# Altium PCB 5811-LNA.PcbDoc
Units mm, origin at the board's own origin, x right, y up, seen from the top; angles counter-clockwise.
Board outline 34.67 x 14.2 mm, 4 copper layers (Top Layer, Internal Plane 1, Signal Layer 1, Bottom Layer), stack 0.925 mm thick; 51 components, 35 nets, 146 pads, 20 vias.
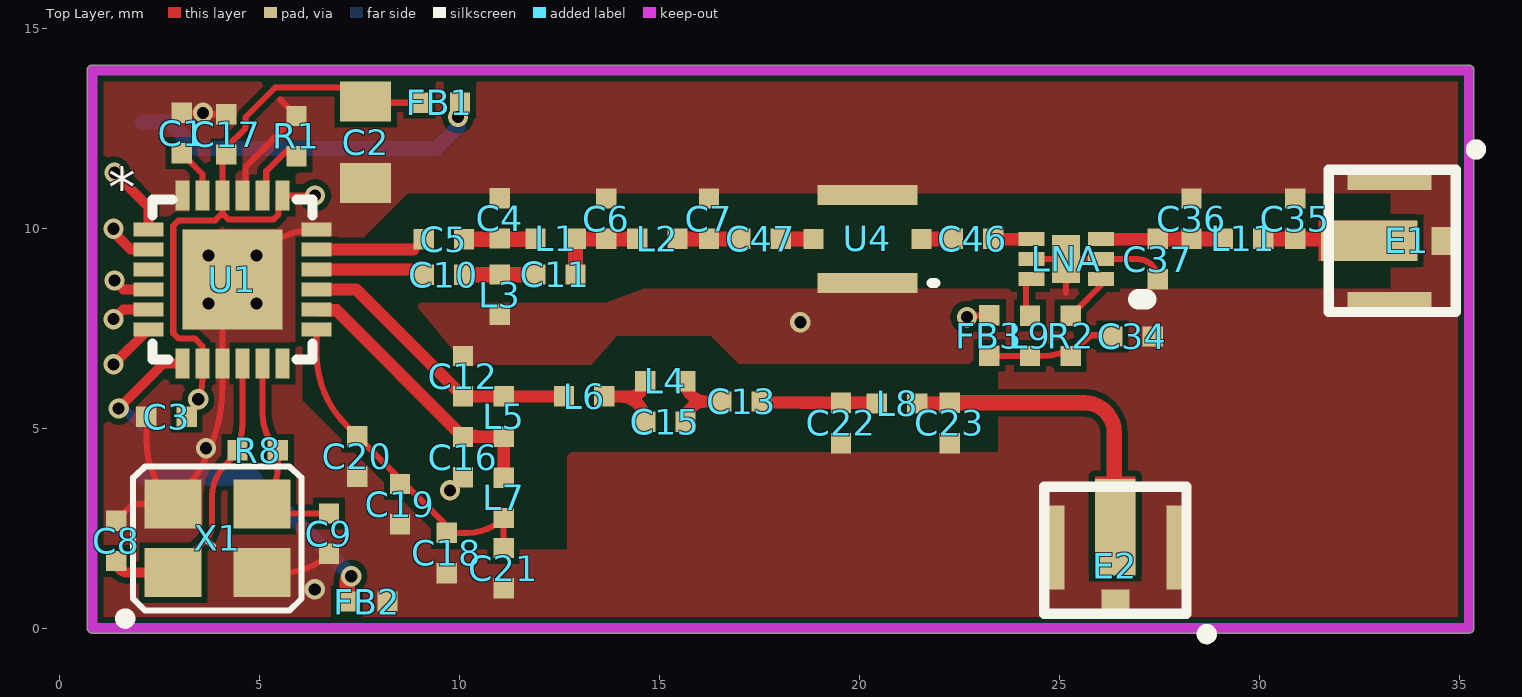
[diagram p0: Top Layer view]
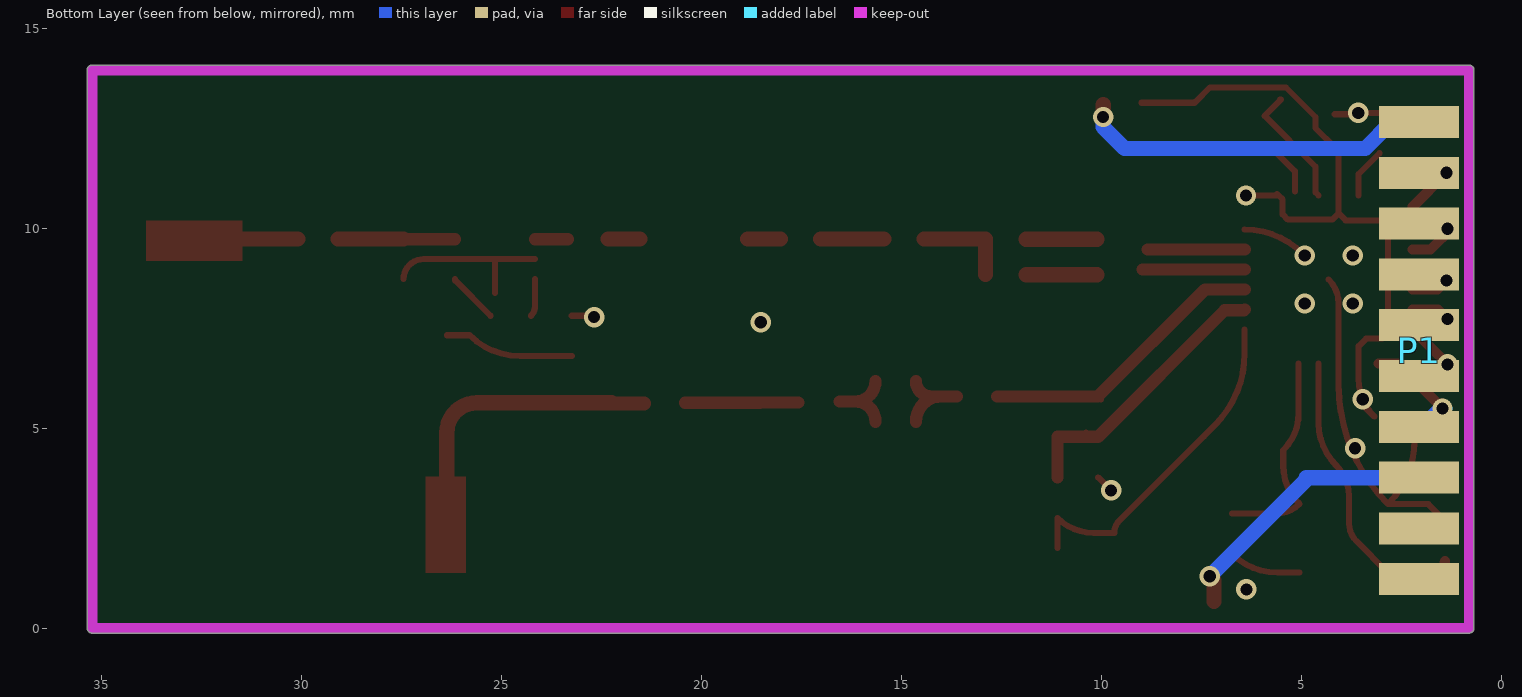
[diagram p1: Bottom Layer view, seen from below]
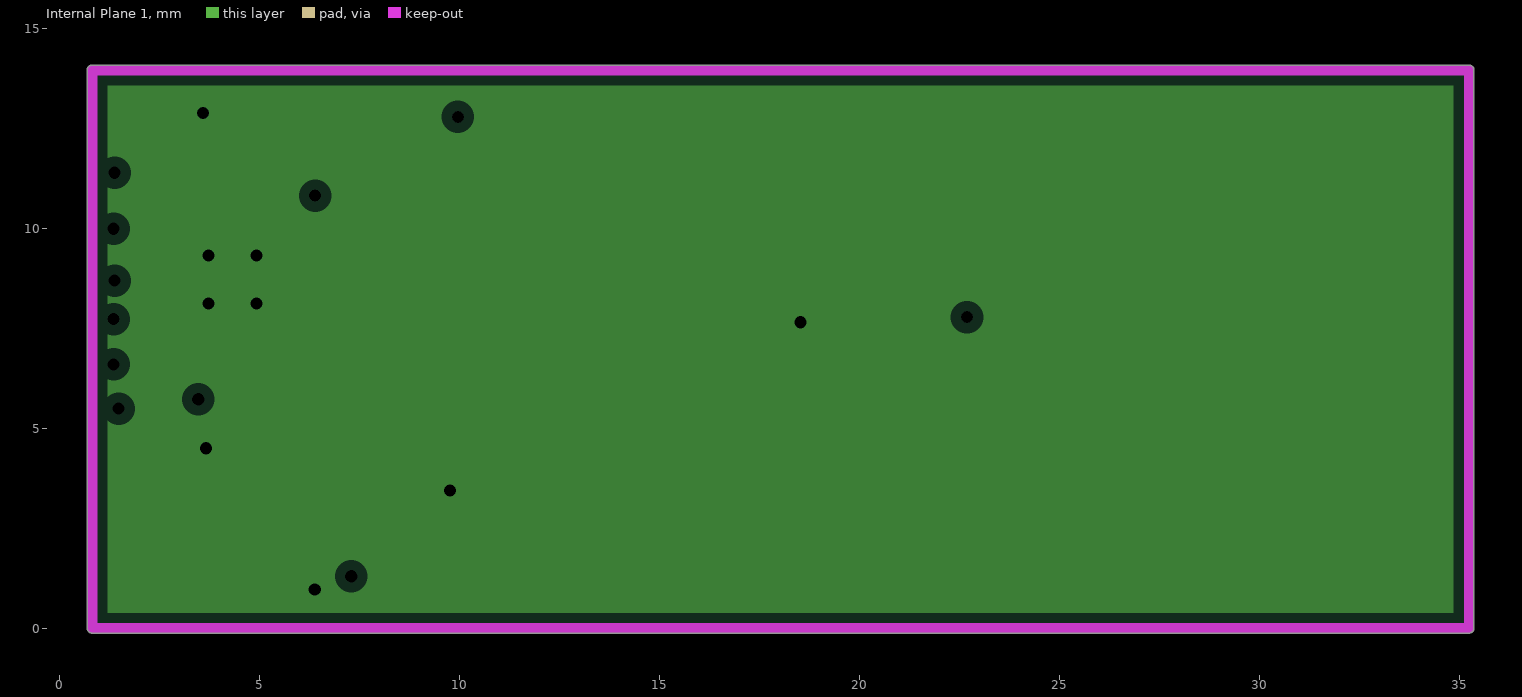
[diagram p2: Internal Plane 1, clearances drawn from the general rule]
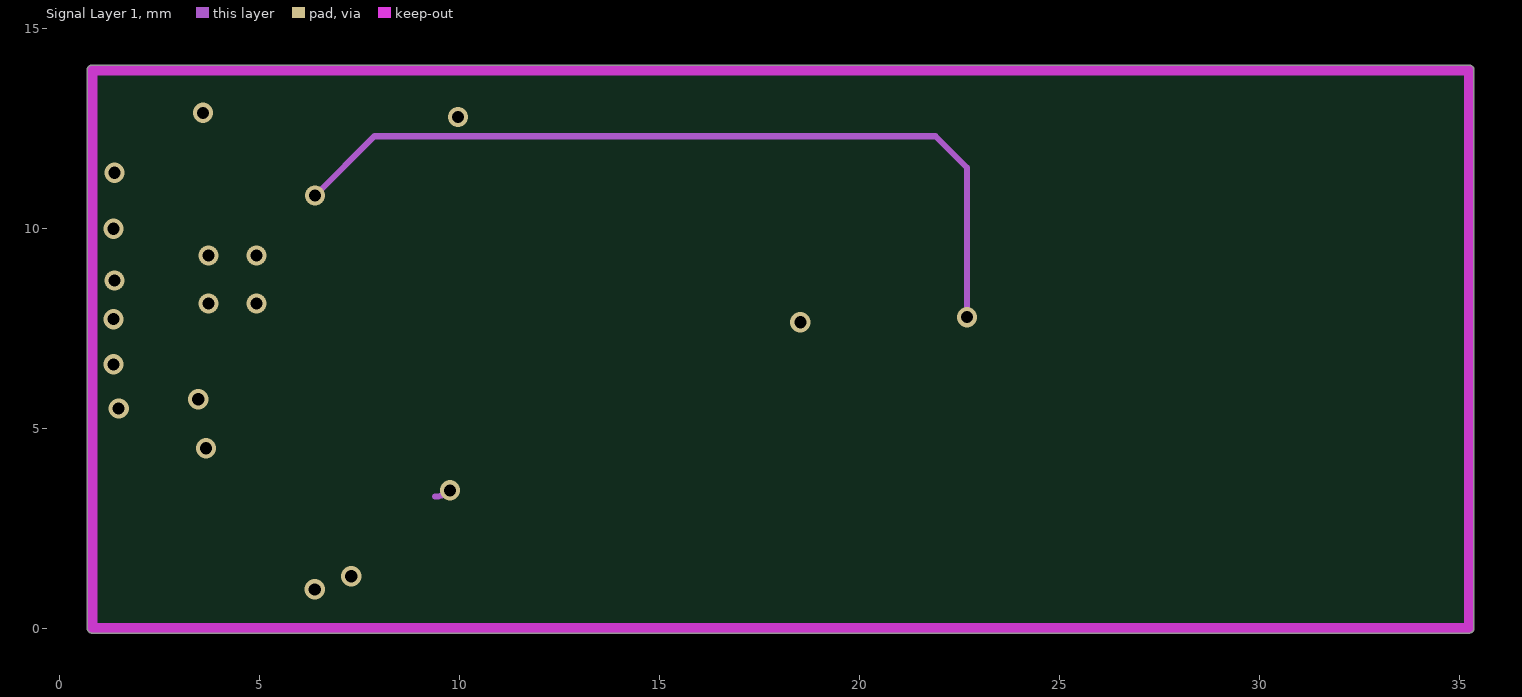
[diagram p3: Signal Layer 1]

## Layer stack, top to bottom
Top Solder: solder mask 0.0102, Solder Resist, Dk 3.5
Top Layer: signal copper 0.0175
Dielectric 1: prepreg 0.195, FR-4, Dk 4.2
Internal Plane 1: plane copper 0.0175, net GND
Dielectric 2: core 0.465, Dk 4.2
Signal Layer 1: signal copper 0.0175
Dielectric 3: prepreg 0.195, Dk 4.2
Bottom Layer: signal copper 0.0175
Bottom Solder: solder mask 0.0102, Solder Resist, Dk 3.5

## Board outline
0.685,0 ccw(c0.813,0) 0.813,-0.127 35.23,-0.127 ccw(c35.23,0) 35.357,0 35.357,13.945 ccw(c35.23,13.945) 35.23,14.072 0.813,14.072 ccw(c0.813,13.945) 0.685,13.945

## Design rules (kind name [scope] priority, off if disabled: settings)
Clearance [All] p1: gap=0.152
MinimumSolderMaskSliver [All] p1 off: minsoldermaskwidth=0.254
PlaneClearance [All] p1: clearance=0.254
PlaneConnect [All] p1: planeconnectstyle=Direct reliefexpansion=0.508 reliefentries=4 reliefconductorwidth=0.254 reliefairgap=0.254
PolygonConnect [All] p1: connectstyle=Direct reliefconductorwidth=0.254 reliefentries=4 polygonreliefangle="90 Angle" airgapwidth=0.254
RoomDefinition LNA [InComponentClass('LNA')] p1 off: confinementstyle=ConfineIn formatcopy=TRUE lockcomponents=FALSE outline 86.233,-48.692 91.821,-48.692 91.821,-41.072 86.233,-41.072
RoomDefinition BK5811 [InComponentClass('BK5811')] p2 off: confinementstyle=ConfineIn formatcopy=TRUE lockcomponents=FALSE outline 86.233,-58.344 246.253,-58.344 246.253,-49.962 86.233,-49.962
RoutingVias [All] p1: holewidth=0.305 width=0.635 viastyle="Through Hole" minholewidth=0.305 minwidth=0.508 maxholewidth=0.711 maxwidth=1.27
SilkToSilkClearance [All] p1 off: silktosilkclearance=0.254
SilkToSolderMaskClearance [IsPad] p1 off: minsilkscreentomaskgap=0.254 clearancetoexposedcopper=TRUE
SolderMaskExpansion [All] p1: expansion=0.102
UnpouredPolygon [All] p1: allowunpoured=FALSE
Width [All] p1: maxlimit=0.508 minlimit=0.152 preferedwidth=0.254
24 further rules are at their usual default settings.

## Classes and differential pairs
component class BK5811: C1 C2 C3 C4 C5 C6 C7 C8 C9 C10 C11 C12 C13 C15 C16 C17 C18 C19 C20 C21 FB1 FB2 L1 L2 L3 L4 L5 L6 L7 P1 R1 R8 U1 X1
component class LNA: C22 C23 C34 C35 C36 C37 C46 C47 E1 E2 FB3 L8 L9 L11 LNA R2 U4

## Components (designator, comment, footprint, x,y, rotation, side; value= is the part's Value field where it differs from the comment)
C1 "33nF" 0402 3.048,12.37 r90 top
C2 "22uF" 0805 7.645,12.141 r90 top
C3 "0.1uF" 0402 2.667,5.283 r0 top
C4 "1pF" 0402 10.998,10.236 r90 top
C5 "1pF" 0402 9.601,9.72 r0 top
C6 "NC" 0402 13.665,10.236 r270 top
C7 "NC" 0402 16.231,10.236 r270 top
C8 "Cap" 0402 1.411,2.177 r90 top
C9 "Cap" 0402 6.731,2.362 r270 top
C10 "1pF" 0402 9.601,8.831 r0 top
C11 "1pF" 0402 12.395,8.839 r180 top
C12 "1pF" 0402 10.084,6.299 r270 top
C13 "1pF" 0402 17.043,5.664 r0 top
C15 "1pF" 0402 15.138,5.156 r0 top
C16 "1pF" 0402 10.084,4.267 r90 top
C17 "0.1uF" 0402 4.166,12.344 r270 top
C18 "1pF" 0402 9.677,1.88 r270 top
C19 "1pF" 0402 8.509,3.099 r270 top
C20 "1pF" 0402 7.442,4.293 r270 top
C21 "1pF" 0402 11.1,1.499 r270 top
C22 "Cap" 0402 19.533,5.131 r270 top
C23 "Cap" 0402 22.25,5.131 r270 top
C34 "Cap" 0402 26.822,7.29 r180 top
C35 "Cap" 0402 30.886,10.236 r270 top
C36 "Cap" 0402 28.296,10.236 r270 top
C37 "Cap" 0402 27.448,9.22 r90 top
C46 "Cap" 0402 22.835,9.728 r180 top
C47 "Cap" 0402 17.526,9.728 r180 top
E1 "Antenna" IPEX 33.249,9.677 r270 top
E2 "Antenna" IPEX 26.391,2.007 r180 top
FB1 "Res2" 0402 9.5,13.132 r0 top
FB2 "Res2" 0402 7.696,0.66 r180 top
FB3 "Res2" 0402 23.241,7.315 r270 top
L1 "2nH" 0402 12.395,9.728 r0 top
L2 "0R/10P" 0402 14.935,9.728 r0 top
L3 "2nH" 0402 10.998,8.331 r90 top
L4 "2nH" 0402 15.138,6.172 r0 top
L5 "2nH" 0402 11.1,5.283 r90 top
L6 "2nH" 0402 13.106,5.791 r0 top
L7 "2nH" 0402 11.1,3.251 r90 top
L8 "Inductor" 0402 20.93,5.613 r0 top
L9 "Inductor" 0402 24.257,7.307 r270 top
L11 "Inductor" 0402 29.591,9.728 r180 top
LNA "SKY65404-31" SKY65404-31 25.162,9.22 r180 top
P1 "RFInf" "RFInf - SINGLESIDE" 2.057,12.649 r180 bottom
R1 "62K 1%" 0402 5.918,12.294 r90 top
R2 "Res2" 0402 25.273,7.307 r270 top
R8 "Res2" 0402 4.953,4.445 r180 top
U1 "BK5811" BK5811 4.318,8.712 r0 top
U4 "BF2012" LFB2H5 20.193,9.728 r180 top
X1 "16Mhz" OSCILLATOR-3.2X2.5 3.937,2.235 r0 top

## Footprints (in the part's own frame and the unit in brackets; to place one, negate y for a bottom-side part, rotate by r counter-clockwise, add the part's x,y. Pads: shape width x height; smd on the part's side, far side on the other; paste and mask are expansions set on the pad)
0402 [mil] "0402-RES"
  rect 20x20 smd: 1(-19.68,0) 2(20,0)
0805 [mm]
  rect 1x1.27 smd: 1(-1.016,0) 2(1.016,0)
  body extent -1.27,-0.76 1.27,0.76, height 0.8
BK5811 [mm]
  rect 2.5x2.5 smd: 0(0,0)
  rect 0.75x0.35 smd: 1(-2.1,1.25) 2(-2.1,0.75) 3(-2.1,0.25) 4(-2.1,-0.25) 5(-2.1,-0.75) 6(-2.1,-1.25) 13(2.1,-1.25) 14(2.1,-0.75) 15(2.1,-0.25) 16(2.1,0.25) 17(2.1,0.75) 18(2.1,1.25)
  rect 0.35x0.75 smd: 7(-1.25,-2.1) 8(-0.75,-2.1) 9(-0.25,-2.1) 10(0.25,-2.1) 11(0.75,-2.1) 12(1.25,-2.1) 19(1.25,2.1) 20(0.75,2.1) 21(0.25,2.1) 22(-0.25,2.1) 23(-0.75,2.1) 24(-1.25,2.1)
  silkscreen extent -2,-2 2,2
IPEX [mm]
  rect 1.016x2.413 smd: 1(0,-0.508)
  rect 0.5x2.1 smd: 2(-1.524,0) 2(1.524,0)
  rect 0.7x0.7 smd: 2(0,1.397)
  Top Layer region: -0.508,-1.778 0.508,-1.778 0.508,0.635 -0.508,0.635
  silkscreen extent -2.41,-1.52 1.78,2.29
LFB2H5 [mm]
  rect 2.5x0.5 smd: 0(0,1.1) 0(0,-1.1)
  rect 0.5x0.5 smd: 1(-1.35,0) 2(1.35,0)
  silkscreen extent -1.7,1.1 -1.6,1.1, body extent -1.25,-1 1.25,1, height 0.9
OSCILLATOR-3.2X2.5 [mil] "OSCILLATOR-3.2X2.5"
  rect 56x48 smd: 1(-43.31,-33.46) 2(44,-33.46) 3(44,34) 4(-43.31,34)
  silkscreen extent -95,-83 83,71
"RFInf - SINGLESIDE" [mm]
  rect 2x0.8 smd: 1(0,0) 2(0,-1.27) 3(0,-2.54) 4(0,-3.81) 5(0,-5.08) 6(0,-6.35) 7(0,-7.62) 8(0,-8.89) 9(0,-10.16) 10(0,-11.43)
SKY65404-31 [mm]
  rect 0.7x1.2 smd: 0(0,0)
  rect 0.65x0.35 smd: 1(-0.87,0.5) 2(-0.87,0) 3(-0.87,-0.5) 4(0.87,-0.5) 5(0.87,0) 6(0.87,0.5)
  silkscreen extent -2,1 -1.8,1

## Part data
C1 C2 C3 C4 C5 C6 C7 C10 C11 C12 C13 C15 C16 C17 C18 C19 C20 C21: library part Cap, "Capacitor"
C8 C9 C22 C23 C34 C35 C36 C37 C46 C47: "Capacitor"
E1 E2: "Generic Antenna"
FB1 FB2 FB3 R2 R8: "Resistor"
L1 L2 L3 L4 L5 L6 L7: library part Inductor, "Inductor"
R1: library part Res2, "Resistor"
X1: library part OSCILLATOR-3.2X2.5, "Crystal Oscillator in 3.2x2.5 SMD"

## Via types
v1: diameter 0.508, hole 0.305, Top Layer to Bottom Layer, 16 vias
v2: diameter 0.508/0.508/0.508 (per signal layer), hole 0.305, Top Layer to Bottom Layer, 4 vias

## Nets (pads, with @x,y where several pads share a name; then routed paths per layer and width w, separated by ;. In a path a pad name is that pad's centre, name@x,y a point inside that pad or via, vN(x,y) a via of type N, cw(c..) or ccw(c..) an arc to the next point about the centre after c; other vN are vias at no path point)
3.3LNA: C34.2 FB3.2 L9.2 R2.2 | length 3.3
  Top Layer w0.152: FB3.2@23.241,6.799 24.538,6.799 ccw(c24.538,8.575) 25.793,7.319 C34.2@26.356,7.319
3.3NRF: C2.2 C3.2 C17.2 FB1.1 FB3.1 U1.8 U1.19 U1.22 | length 39
  Top Layer w0.152: C17.2@4.068,11.836 U1.22 4.068,10.367 ; C17.2@4.166,12.013 4.648,12.496 4.648,12.775 5.386,13.513 7.29,13.513 C2.2 ; U1.19@5.606,10.85 U1.19 ; v1(6.384,10.812) U1.19 ; C2.2@7.671,13.132 FB1.1 ; v1(22.682,7.772) 22.717,7.807 FB3.1@23.241,7.807 ; v1(3.465,5.717) cw(c2.226,6.232) C3.2 3.465,5.573 v1(3.465,5.717) ; v1(3.465,5.717) ccw(c2.226,6.232) 3.568,6.232 U1.8 3.568,7.049 3.384,7.234 2.973,7.234 2.839,7.368 2.839,10.057 2.973,10.191 3.892,10.191 4.068,10.367 ; 4.068,10.367 4.227,10.209 5.338,10.209 5.472,10.343 5.472,10.716 U1.19
  Signal Layer 1 w0.152: v1(6.384,10.812) 7.865,12.294 21.895,12.294 22.682,11.506 v1(22.682,7.772)
CE: P1.2 U1.1 | length 1.8
  Top Layer w0.254: v1(1.372,11.379) 2.218,10.533 U1.1
CSN: P1.3 U1.2 | length 1.3
  Top Layer w0.254: v1(1.346,9.982) 1.338,9.99 1.245,9.99 1.773,9.462 U1.2
GND: C1.2 C2.1 C3.1 C4.2 C6.1 C7.1 C8.2 C9.2 C12.1 C16.1 C17.1 C18.2 C19.2 C20.2 C21.2 C22.2 C23.2 C34.1 C35.1 C36.1 C37.1 E1.2 E2.2 FB2.1 L3.1 LNA.0 LNA.2 LNA.5 R1.2 U1.0 U1.9 U1.18 U1.21 U1.24 U4.0 X1.2 X1.4 | length 23
  Top Layer w0.152: C8.2 1.825,3.099 X1.4 ; C3.1 2.167,4.716 ccw(c4.455,4.716) X1.4 ; C1.2 v1(3.581,12.878) ; v1@3.615,12.844 C17.1 ; U1.0 ccw(c4.922,8.109) 4.068,8.109 U1.9 4.068,6.071 cw(c-0.135,6.071) X1.4 ; U1.21 4.648,10.892 4.648,11.532 R1.2 5.512,13.208 5.537,13.208 ; v2(4.918,9.312) 4.967,9.361 cw(c6.418,7.91) U1.18 ; X1.2 5.599,1.385 ccw(c5.599,2.986) C9.2 ; v1(9.758,3.441) C16.1 ; LNA.5@24.162,9.22 LNA.0 ; 25.162,8.382 LNA.0 ; C37.1 ccw(c26.948,8.72) 26.948,9.22 26.162,9.22 LNA.0
  Signal Layer 1 w0.152: 9.381,3.285 ccw(c9.381,3.817) v1(9.758,3.441)
  other v1: 6.375,0.965 3.658,4.496 18.517,7.645
  other v2: 3.718,8.112 4.918,8.112 3.718,9.312
IRQ: P1.7 U1.7 | length 3
  Top Layer w0.254: v1(1.473,5.486) 1.473,5.613 1.594,5.613 2.593,6.612 U1.7
  Bottom Layer w0.254: v1@1.346,5.486 v1(1.473,5.486) 1.6,5.486 P1.7
MISO: P1.6 U1.6 | length 1.2
  Top Layer w0.254: v1(1.346,6.59) U1.6
MOSI: P1.5 U1.5 | length 1
  Top Layer w0.254: v1(1.346,7.722) 1.587,7.962 U1.5
NetC1_1: C1.1 U1.23 | length 1.3
  Top Layer w0.152: C1.1 3.568,11.35 U1.23
NetC4_1: C4.1 C5.2 L1.1 | length 1.8
  Top Layer w0.381: C5.2 L1.1@11.887,9.72
NetC5_1: C5.1 U1.17 | length 2.4
  Top Layer w0.305: U1.17 8.843,9.462
NetC6_2: C6.2 C11.1 L1.2 L2.1 | length 2.4
  Top Layer w0.152: L1.2@12.895,9.72 L1.2
  Top Layer w0.381: C11.1 L1.2@12.895,9.72 ; L1.2 C6.2 L2.1
NetC7_2: C7.2 C47.2 L2.2 | length 1.6
  Top Layer w0.381: L2.2 C7.2 C47.2
NetC8_1: C8.1 R8.2 U1.10 X1.1 | length 7.1
  Top Layer w0.152: X1.1 3.628,2.176 ccw(c3.187,2.616) 3.81,2.616 3.81,3.285 cw(c4.919,3.285) 4.135,4.069 ccw(c3.089,5.115) 4.568,5.115 U1.10
  Top Layer w0.254: C8.1 ccw(c1.703,1.677) 1.703,1.385 X1.1@2.554,1.385
NetC9_1: C9.1 R8.1 U1.11 X1.3 | length 5.5
  Top Layer w0.152: X1.3@5.068,3.131 cw(c5.022,3.131) X1.3 ; U1.11 5.068,5.374 ccw(c6.382,5.374) R8.1 5.453,4.061 cw(c4.093,4.061) X1.3 ; C9.1 5.626,2.862 cw(c5.626,3.67) X1.3
NetC10_1: C10.1 U1.16 | length 2.6
  Top Layer w0.305: U1.16 C10.1@8.97,8.962
NetC10_2: C10.2 C11.2 L3.2 | length 1.8
  Top Layer w0.381: C10.2 C11.2@11.879,8.831
NetC12_2: C12.2 L5.2 L6.1 U1.15 | length 7.4
  Top Layer w0.152: C12.2@10.008,5.715 C12.2
  Top Layer w0.305: U1.15 7.413,8.462 C12.2 L5.2 L6.1
NetC13_1: C13.1 C15.2 L4.2 | length 2
  Top Layer w0.305: C15.2 cw(c16.154,5.156) 16.154,5.664 ; L4.2 ccw(c16.154,6.172) 16.154,5.664 ; C13.1 16.154,5.664
NetC13_2: C13.2 C22.1 L8.1 | length 2.8
  Top Layer w0.305: C13.2@17.577,5.639 18.542,5.639 ; 18.542,5.631 C22.1 L8.1@20.412,5.631
NetC15_1: C15.1 L4.1 L6.2 | length 2.2
  Top Layer w0.305: L6.2 14.003,5.791 ; C15.1 ccw(c14.003,5.156) 14.003,5.791 ; L4.1 cw(c14.257,6.172) 14.257,5.791 14.003,5.791
NetC16_2: C16.2 L5.1 L7.2 U1.14 | length 7.2
  Top Layer w0.152: C16.2@10.008,4.851 C16.2 ; 10.381,4.877 10.389,4.885
  Top Layer w0.305: U1.14 6.438,7.942 6.919,7.942 C16.2@10.084,4.777 ; C16.2 C16.2@10.084,4.777 ; L7.2 L5.1 10.084,4.783 C16.2@10.084,4.777
NetC18_1: C18.1 C19.1 C20.1 C21.1 L7.1 U1.13 | length 8.6
  Top Layer w0.152: U1.13 6.418,6.869 ccw(c8.958,6.869) 7.162,5.073 C20.1 9.552,2.683 cw(c9.248,2.38) C18.1 10.203,2.38 ccw(c10.203,3.648) L7.1 C21.1
NetC23_1: C23.1 E2.1 L8.2 | length 7.7
  Top Layer w0.356: L8.2 22.208,5.613 ccw(c22.208,5.673) C23.1
  Top Layer w0.381: C23.1 25.611,5.631 cw(c25.611,4.877) 26.365,4.877 26.365,2.54 ccw(c26.391,2.54) E2.1
NetC35_2: C35.2 E1.1 L11.1 | length 2.6
  Top Layer w0.381: L11.1 C35.2 E1.1@32.69,9.728
NetC36_2: C36.2 C37.2 L11.2 LNA.3 | length 2.9
  Top Layer w0.305: LNA.3@26.162,9.72 C37.2@27.44,9.72
  Top Layer w0.381: C37.2 C36.2 L11.2
NetC46_1: C46.1 LNA.4 | length 0.8
  Top Layer w0.152: LNA.4@24.154,9.728 LNA.4@24.162,9.72
  Top Layer w0.305: C46.1@23.343,9.72 LNA.4@24.162,9.72
NetC46_2: C46.2 U4.1 | length 0.8
  Top Layer w0.381: U4.1 C46.2
NetC47_1: C47.1 U4.2 | length 0.8
  Top Layer w0.381: C47.1 U4.2
NetFB1_2: FB1.2 P1.1 | length 9
  Top Layer w0.381: v1(9.957,12.776) FB1.2@9.957,13.081
  Bottom Layer w0.381: P1.1 2.743,12.649 3.404,11.989 9.423,11.989 9.957,12.522 v1(9.957,12.776)
NetFB2_2: FB2.2 P1.8 | length 7
  Top Layer w0.381: FB2.2 7.188,1.194 v1(7.29,1.295)
  Bottom Layer w0.381: P1.8 4.877,3.759 4.877,3.708 v1(7.29,1.295)
NetL9_1: L9.1 LNA.6 | length 0.9
  Top Layer w0.152: LNA.6@24.162,8.72 24.162,8.037 ccw(c24.486,8.037) L9.1
NetLNA_1: LNA.1 R2.1 | length 1.3
  Top Layer w0.152: R2.1 26.145,8.679 ccw(c26.104,8.72) LNA.1@26.162,8.72
NetR1_1: R1.1 U1.20 | length 1.2
  Top Layer w0.152: U1.20@5.164,10.909 5.164,11.421 R1.1@5.664,11.921
SCK: P1.4 U1.4 | length 0.9
  Top Layer w0.254: v1(1.372,8.687) 1.596,8.462 U1.4
pads on no net: P1.9 P1.10 U1.3 U1.12

## Polygon pours and split planes (outlines as drawn)
GND on Top Layer "Top Layer-No Net" (solid, remove dead copper, pour order 2): -2.972,16.789 38.064,16.789 cw(c38.064,14.249) 39.86,16.045 39.954,15.951 cw(c39.525,15.522) 40.132,15.522 40.132,-1.575 40.132,-1.766 cw(c39.612,-1.766) 39.98,-2.134 cw(c39.489,-1.643) 39.489,-2.337 26.67,-2.337 -0.37,-2.337 cw(c-0.37,0.203) -2.166,-1.593 -2.489,-1.27 -3.193,-0.566 cw(c-1.397,1.23) -3.937,1.23 -3.937,12.497 -3.937,15.487 cw(c-2.203,15.487) -3.429,16.713
GND on Internal Plane 1 (split plane): 34.847,0.383 1.196,0.383 1.196,13.562 34.847,13.562

## Keep-outs
Keep-Out Layer:
  lines w0.254: 0.813,0 35.23,0 35.23,13.945 0.813,13.945 0.813,0

## Other copper
Top Layer:
  pour cut-out: 6.063,9.713 6.063,5.688 9.798,1.953 12.693,1.953 12.693,4.394 23.47,4.394 23.47,6.608 16.973,6.608 16.278,7.303 13.923,7.303 13.291,6.578 10.145,6.578 8.856,8.128 13.633,8.128 14.596,8.484 33.274,8.484 33.274,10.871 8.696,10.871 7.538,9.713

## Text inside footprints (layer, text, board x,y; h text height)
U1: Top Overlay "*" at 1.218,10.512 h1.02